# EAGLE board ECG 7 by 7 (EAGLE 9.6.2)
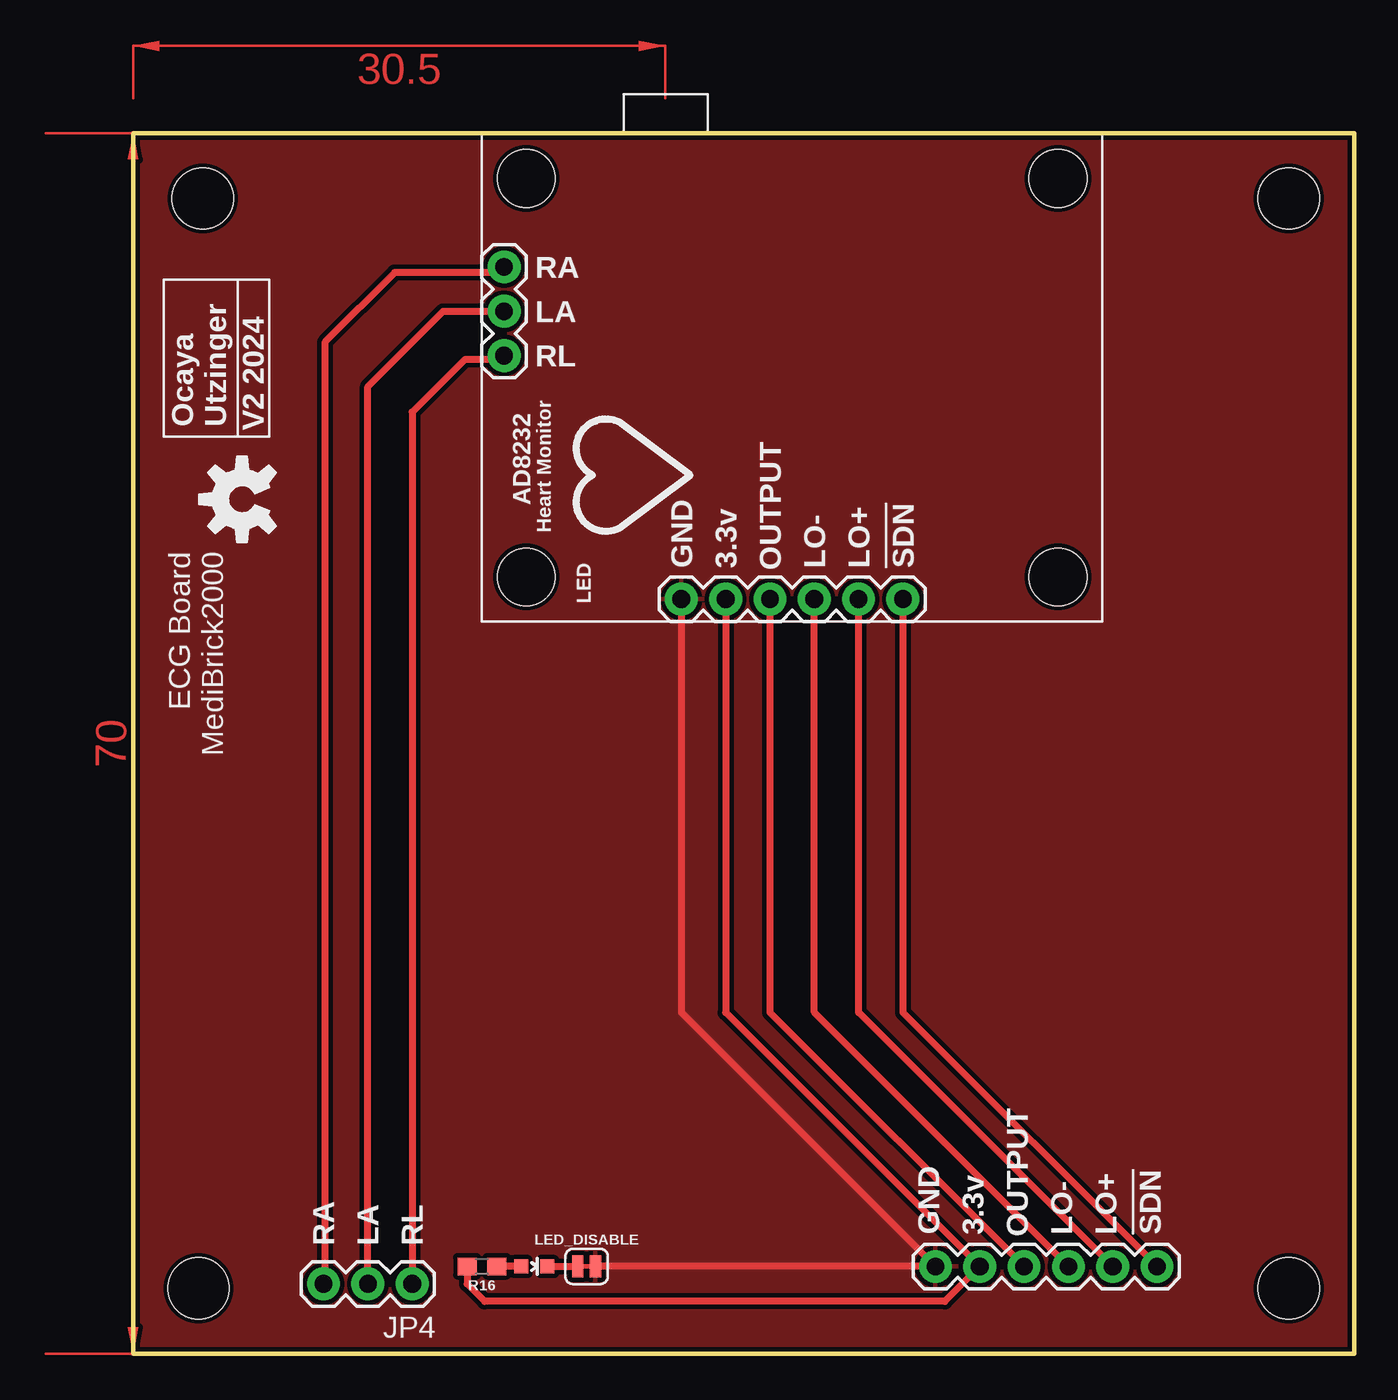
[diagram p0: board, top side]
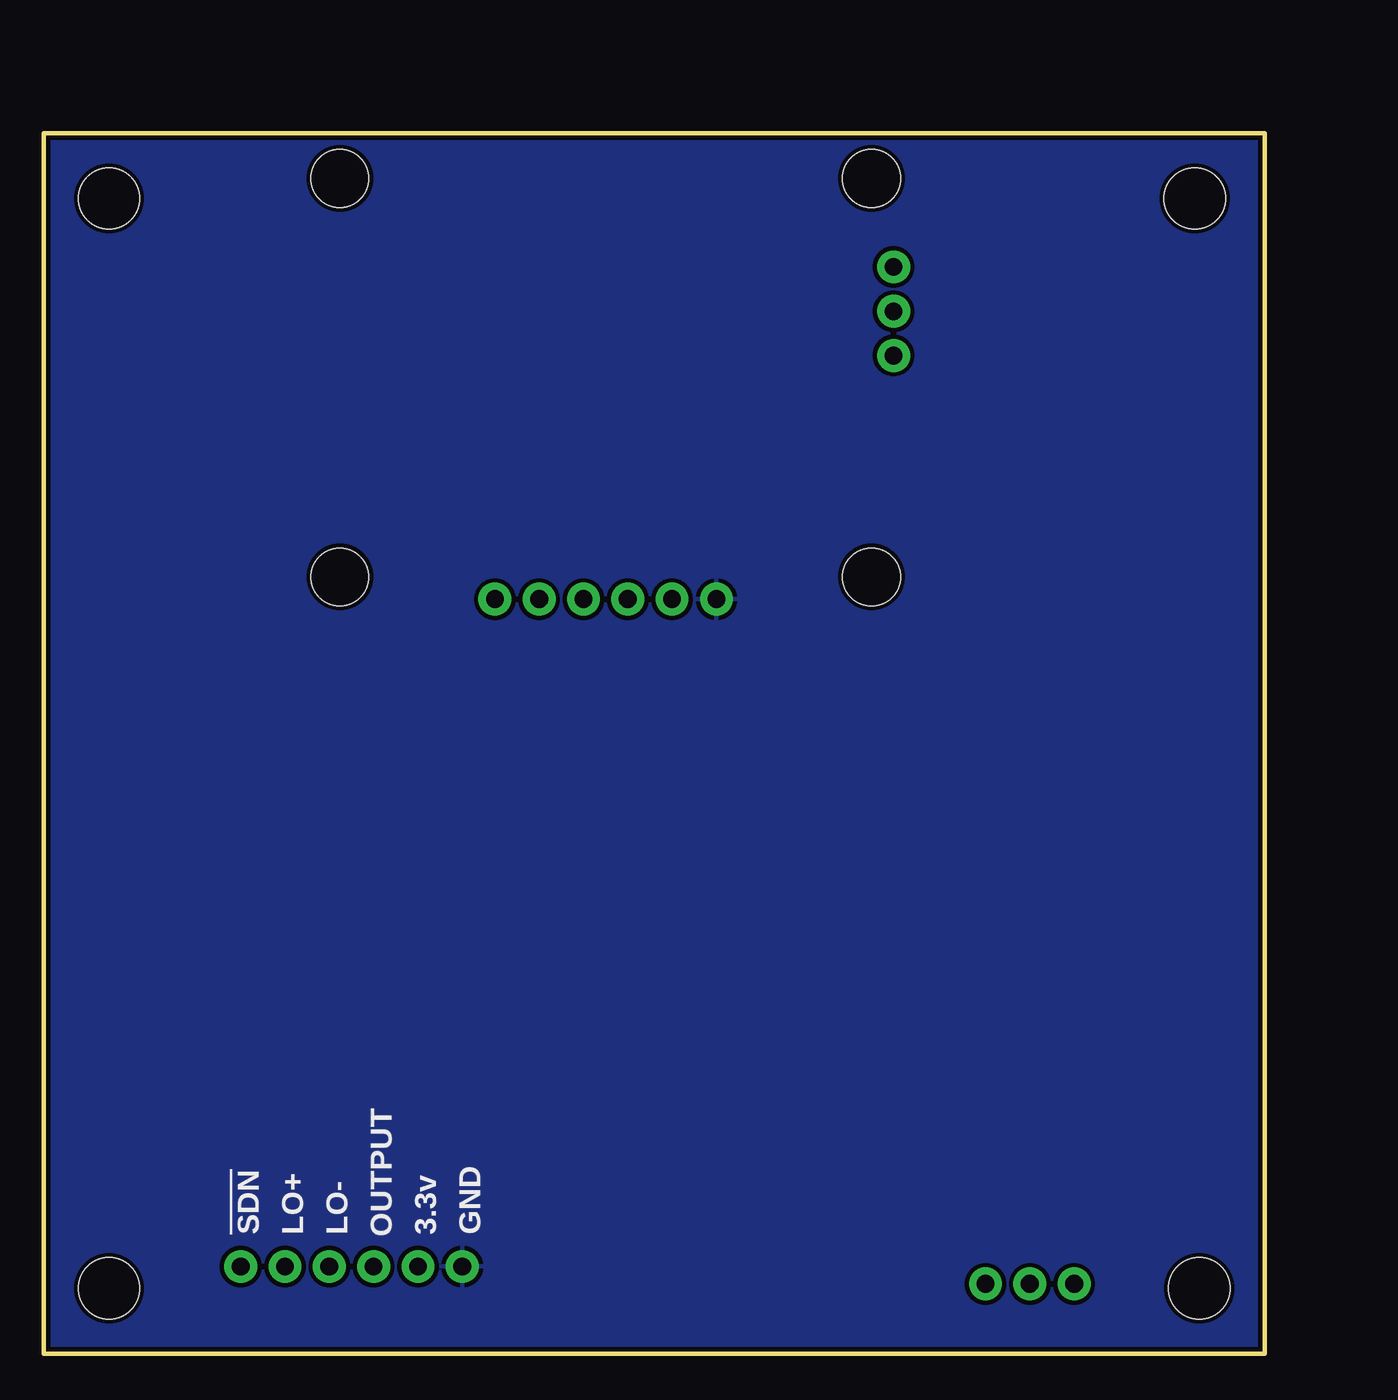
[diagram p1: board, bottom side, seen from below]

Size 70 x 70 mm. Coordinates in mm from the lower left corner, seen from the top.
Outline: 70,0 70,70 0,70 0,0 70,0
Copper layers (1*16): Top 0.035mm / dielectric 1.5mm / Bottom 0.035mm
Design rules "default": minimum track width 7mil, minimum drill 15mil, track to track 6mil, track to pad 8mil, pad to pad 8mil, via to via 8mil, smd to smd 8mil, copper to edge 8mil, drill to drill 8mil, minimum pad ring 12mil, minimum via ring 10mil, stop-mask expansion 4mil, vias tented up to drill 20mil, thermal gap 10mil
Holes 3.5 mm at 4,66.25 66.25,66.25 3.75,3.75 66.25,3.75

## Footprints (pad centres in the part's own frame; a part is rotated, then mirrored left to right if it is on the bottom)
LED-0603 = smd 0.8 x 0.8: A 0,-0.75; C 0,0.75
1X06 = drill 1.016 pad 1.88: 1 0,0; 2 2.54,0; 3 5.08,0; 4 7.62,0; 5 10.16,0; 6 12.7,0
1X03 = drill 1.016 pad 1.88: 1 0,0; 2 2.54,0; 3 5.08,0
SMT-JUMPER_2_NC_TRACE_SILK = smd 0.635 x 1.27: 1 -0.508,0; 2 0.508,0
0603 = smd 1.1 x 1: 1 -0.85,0; 2 0.85,0
SPARK_ECG = drill 1.016 pad 1.88: 1 11.43,1.27; 2 13.97,1.27; 3 16.51,1.27; 4 19.05,1.27; 5 21.59,1.27; 6 24.13,1.27; 7 1.27,15.24; 8 1.27,17.78; 9 1.27,20.32 | hole 3.302: 2.54,25.4; 33.02,25.4; 33.02,2.54; 2.54,2.54

## Placement (x,y rotation side)
D1  RED  [LED-0603]  23,5 270 top
FRAME1  FRAME-LETTERNO_PACKAGE  [DUMMY]  -3,-1 0 top
JP2  [1X06]  46,5 0 top
JP4  [1X03]  16,4 180 top
LED_DISABLE  JUMPER-SMT_2_NC_TRACE_SILK  [SMT-JUMPER_2_NC_TRACE_SILK]  26,5 180 top
R16  1k  [0603]  20,5 180 top
U$1  [SPARK_ECG]  20,42 0 top
U$2  [OSHW-LOGO-M]  6.25,49 90 top

## Library data of the parts
D1 = SparkFun-LED; PROD_ID: DIO-00819
FRAME1 = SparkFun-Aesthetics; DESIGNER: Nobody; VERSION: v01
JP2 JP4 = SparkFun-Connectors
LED_DISABLE = SparkFun-Jumpers
R16 = SparkFun-Resistors; PROD_ID: RES-07856
U$1 = SPARK_ECG
U$2 = SparkFun-Aesthetics

## Nets
3.3V: JP2.2 R16.2 U$1.2
GND: JP2.1 LED_DISABLE.1 U$1.1
N$1: JP4.1 U$1.7
N$2: JP4.2 U$1.8
N$3: JP4.3 U$1.9
N$4: JP2.6 U$1.6
N$5: JP2.5 U$1.5
N$6: JP2.4 U$1.4
N$7: JP2.3 U$1.3
N$26: D1.A R16.1
N$28: D1.C LED_DISABLE.2

## Tracks (layer width: path | path; a pad name or v marks a point on that pad's centre or on a via)
3.3V
  Top 0.406: R16.2 19.15,4 20.15,3 46.54,3 JP2.2 33.97,19.57 U$1.2
GND
  Top 0.406: LED_DISABLE.1 JP2.1 31.43,19.57 U$1.1
  pour Top (isolate 0.254): 0,70 70,70 70,0 0,0
  pour Bottom (isolate 0.254): 0,70 70,70 70,0 0,0
N$1
  Top 0.406: U$1.7 21.03,57 19,57 16,54 JP4.1
N$2
  Top 0.406: JP4.2 13.46,55.46 17.78,59.78 U$1.8
N$3
  Top 0.406: U$1.9 20.95,62 15,62 11,58 11,4.08 JP4.3
N$4
  Top 0.406: JP2.6 44.35,19.35 44.29,19.41 44.13,19.57 U$1.6
N$5
  Top 0.406: U$1.5 41.59,19.57 JP2.5
N$6
  Top 0.406: U$1.4 39.05,19.57 JP2.4
N$7
  Top 0.406: U$1.3 36.51,19.57 JP2.3
N$26
  Top 0.406: D1.A R16.1
N$28
  Top 0.406: D1.C LED_DISABLE.2
(copper drawn outside any net)
  shapes: Top area x2

## Text on the board
tPlace: GND | 3.3v | OUTPUT | LO- | LO+ | !SDN | RA | LA | RL
bPlace: GND | 3.3v | OUTPUT | LO- | LO+ | !SDN
tNames: Ocaya / Utzinger | V2 2024 | ECG Board / MediBrick2000